# Altium PCB 下.PCBDOC
Units mm, origin at the board's own origin, x right, y up, seen from the top; angles counter-clockwise.
Board outline 146 x 45 mm, 2 copper layers (Top Layer, Bottom Layer); 4 components, 41 nets, 122 pads, 0 vias.
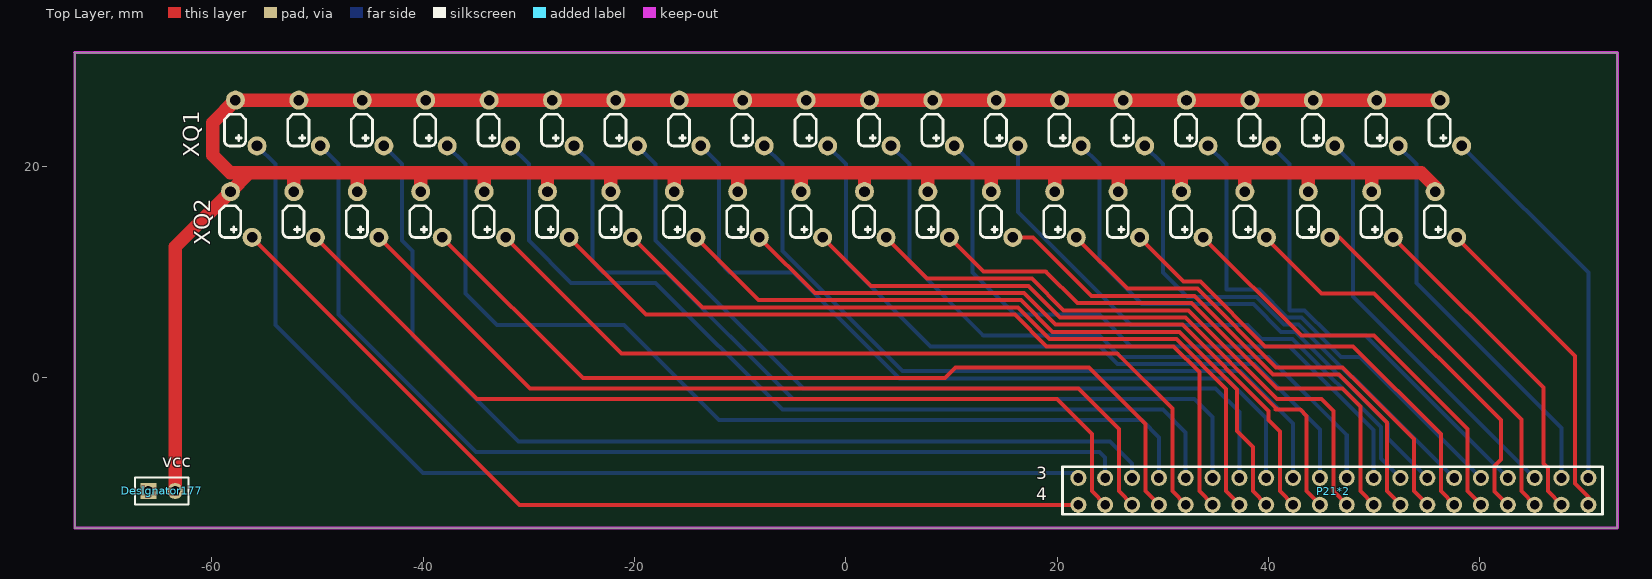
[diagram p0: Top Layer view]
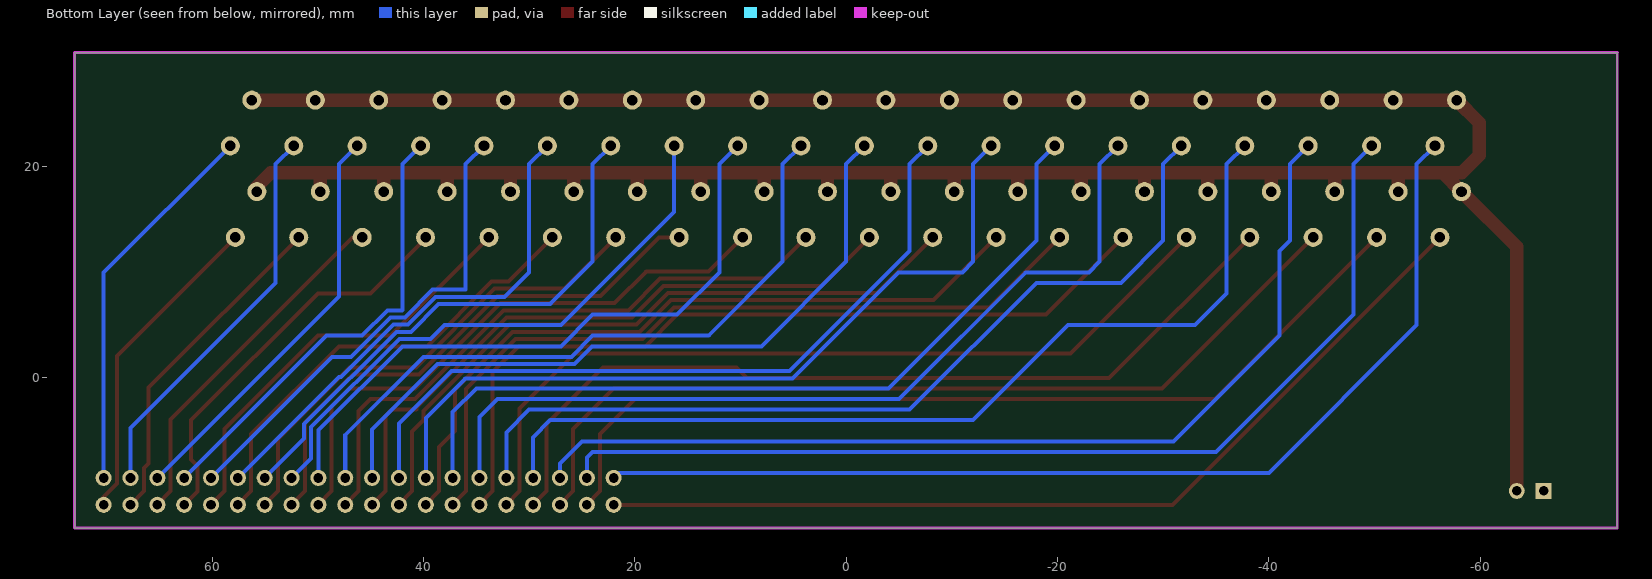
[diagram p1: Bottom Layer view, seen from below]

## Layer stack, top to bottom
Top Layer: signal copper 0.0356
Dielectric: dielectric 0.32, FR-4, Dk 4.8
Bottom Layer: signal copper 0.0356

## Board outline
-72.979,-14.2 73.022,-14.2 73.022,30.8 -72.978,30.8 -72.979,30.799

## Design rules (kind name [scope] priority, off if disabled: settings)
Clearance [All] p1: gap=0.3
FabricationTestPointUsage TestPointUsage [All] p1: valid=0 allowmultiple=FALSE
FabricationTestpoint Testpoint [All] p1: side=3 testpointundercomponent=TRUE minsize=1.016 maxsize=2.54 preferedsize=1.524 minholesize=0 maxholesize=1.016 preferedholesize=0.813 testpointgrid=0.025 allowsidetop=TRUE allowsidebottom=TRUE usegrid=TRUE gridtolerance=0
PolygonConnect [All] p1: connectstyle=Relief reliefconductorwidth=0.254 reliefentries=4 polygonreliefangle="90 Angle" airgapwidth=0.254
RoutingVias [All] p1: holewidth=0.8 width=1.6 viastyle="Through Hole" minholewidth=0.711 minwidth=1.27 maxholewidth=0.711 maxwidth=1.27
SilkToSolderMaskClearance SilkscreenOverComponentPads [IsPad] p1: minsilkscreentomaskgap=0.254 clearancetoexposedcopper=TRUE
SolderMaskExpansion [All] p1: expansion=0.102
Width Width_1 [All] p1: maxlimit=1.27 minlimit=0.254 preferedwidth=0.381 minimp=50.000000 maximp=50.000000 favimp=50.000000
Width [InNet('GND')] p2: maxlimit=1.27 minlimit=0.254 preferedwidth=0.381
25 further rules are at their usual default settings.

## Components (designator, comment, footprint, x,y, rotation, side; value= is the part's Value field where it differs from the comment)
Designator177 "" HDR1X2 -66.015,-10.693 r0 top
P21*2 "Header 21X2" XinPian 22,-12 r180 top
XQ1 "Header 20X2" XIANQUAN1 58.272,21.96 r180 top
XQ2 "Header 20X2" XIANQUAN1 57.8,13.3 r180 top

## Footprints (in the part's own frame and the unit in brackets; to place one, negate y for a bottom-side part, rotate by r counter-clockwise, add the part's x,y. Pads: shape width x height; smd on the part's side, far side on the other; paste and mask are expansions set on the pad)
HDR1X2 [mm] "Connector; Header; 2 Position"
  rect 1.5x1.5 hole 0.9: 1(0,0)
  round 1.5 hole 0.9: 2(2.54,0)
  silkscreen extent -1.27,-1.27 3.81,1.27
XIANQUAN1 [mm]
  round 1.8 hole 1: 1(2.04,-4.34) 2(0,0) 3(8.04,-4.34) 4(6,0) 5(14.04,-4.34) 6(12,0) 7(20.04,-4.34) 8(18,0) 9(26.04,-4.34) 10(24,0) 11(32.04,-4.34) 12(30,0) 13(38.04,-4.34) 14(36,0) 15(44.04,-4.34) 16(42,0) 17(50.04,-4.34) 18(48,0) 19(56.04,-4.34) 20(54,0) 21(62.04,-4.34) 22(60,0) 23(68.04,-4.34) 24(66,0) 25(74.04,-4.34) 26(72,0) 27(80.04,-4.34) 28(78,0) 29(86.04,-4.34) 30(84,0) 31(92.04,-4.34) 32(90,0) 33(98.04,-4.34) 34(96,0) 35(104.04,-4.34) 36(102,0) 37(110.04,-4.34) 38(108,0) 39(116.04,-4.34) 40(114,0)
  silkscreen extent 1.08,-3 117.08,0
XinPian [mil]
  round 60 hole 36: 1(0,-100) 2(-100,-100) 3(-200,-100) 4(-300,-100) 5(-400,-100) 6(-500,-100) 7(-600,-100) 8(-700,-100) 9(-800,-100) 10(-900,-100) 11(-1000,-100) 12(-1100,-100) 13(-1200,-100) 14(-1300,-100) 15(-1400,-100) 16(-1500,-100) 17(-1600,-100) 18(-1700,-100) 19(-1800,-100) 20(-1900,-100) 21(-1900,0) 22(-1800,0) 23(-1700,0) 24(-1600,0) 25(-1500,0) 26(-1400,0) 27(-1300,0) 28(-1200,0) 29(-1100,0) 30(-1000,0) 31(-900,0) 32(-800,0) 33(-700,0) 34(-600,0) 35(-500,0) 36(-400,0) 37(-300,0) 38(-200,0) 39(-100,0) 40(0,0)
  silkscreen extent -1953,-142 59,35

## Part data
P21*2: library part "Header 22X2", "Header, 22-Pin, Dual row"
XQ1 XQ2: "Header, 20-Pin, Dual row"

## Nets (pads, with @x,y where several pads share a name; then routed paths per layer and width w, separated by ;. In a path a pad name is that pad's centre, name@x,y a point inside that pad or via, vN(x,y) a via of type N, cw(c..) or ccw(c..) an arc to the next point about the centre after c; other vN are vias at no path point)
GND: Designator177.2 XQ1.1 XQ1.3 XQ1.5 XQ1.7 XQ1.9 XQ1.11 XQ1.13 XQ1.15 XQ1.17 XQ1.19 XQ1.21 XQ1.23 XQ1.25 XQ1.27 XQ1.29 XQ1.31 XQ1.33 XQ1.35 XQ1.37 XQ1.39 XQ2.1 XQ2.3 XQ2.5 XQ2.7 XQ2.9 XQ2.11 XQ2.13 XQ2.15 XQ2.17 XQ2.19 XQ2.21 XQ2.23 XQ2.25 XQ2.27 XQ2.29 XQ2.31 XQ2.33 XQ2.35 XQ2.37 XQ2.39 | length 303
  Top Layer w1.27: Designator177.2 -63.475,12.405 XQ2.39 -56.47,19.41 ; XQ2.37 -52.24,19.37 -52.2,19.41 ; XQ2.35 -46.24,19.35 -46.18,19.41 ; XQ2.33 -40.24,19.32 -40.15,19.41 ; XQ2.31 -34.24,19.37 -34.2,19.41 ; XQ2.29 -28.24,19.35 -28.18,19.41 ; XQ2.27 -22.24,19.22 -22.05,19.41 ; XQ2.25 -16.24,19.25 -16.08,19.41 ; XQ2.23 -10.24,19.41 ; XQ2.21 -4.24,19.4 ; XQ2.19 1.76,19.4 ; XQ2.17 7.76,19.27 7.9,19.41 ; XQ2.15 13.76,19.35 13.82,19.41 ; XQ2.13 19.76,19.22 19.95,19.41 ; XQ2.11 25.76,19.32 25.85,19.41 ; XQ2.9 31.76,19.17 32,19.41 ; XQ2.7 37.76,19.27 37.9,19.41 ; XQ2.5 43.76,19.37 43.8,19.41 ; XQ2.3 49.76,19.4 49.77,19.41 ; XQ2.1 55.76,18.09 54.44,19.41 49.77,19.41 ; XQ1.1 XQ1.39 -59.91,24.159 -59.91,21.07 -58.25,19.41 -56.47,19.41 ; -56.47,19.41 -52.2,19.41 ; -52.2,19.41 -46.18,19.41 ; -46.18,19.41 -40.15,19.41 ; -40.15,19.41 -34.2,19.41 ; -34.2,19.41 -28.18,19.41 ; -28.18,19.41 -22.05,19.41 ; -22.05,19.41 -16.08,19.41 ; -16.08,19.41 -10.24,19.41 ; -10.24,19.41 7.9,19.41 ; 7.9,19.41 13.82,19.41 ; 13.82,19.41 19.95,19.41 ; 19.95,19.41 25.85,19.41 ; 25.85,19.41 32,19.41 ; 32,19.41 37.9,19.41 ; 37.9,19.41 43.8,19.41 ; 43.8,19.41 49.77,19.41
XQ1_1: P21*2.20 XQ1.2 | length 36.4
  Bottom Layer w0.381: XQ1.2 70.26,9.972 P21*2.20
XQ1_2: P21*2.19 XQ1.4 | length 37.8
  Bottom Layer w0.381: XQ1.4 54,20.232 54,9 67.72,-4.72 P21*2.19
XQ1_3: P21*2.18 XQ1.6 | length 39.3
  Bottom Layer w0.381: XQ1.6 48,20.232 48,7.72 P21*2.18
XQ1_4: P21*2.17 XQ1.8 | length 43.5
  Bottom Layer w0.381: XQ1.8 42,20.232 42,6.449 42.044,6.405 43.41,6.405 45.815,4 49.18,4 P21*2.17
XQ1_5: P21*2.16 XQ1.10 | length 45.8
  Bottom Layer w0.381: XQ1.10 36,20.232 36,8.362 39.124,8.362 41.762,5.724 43.128,5.724 46.852,2 48.64,2 P21*2.16
XQ1_6: P21*2.15 XQ1.12 | length 48.3
  Bottom Layer w0.381: XQ1.12 30,20.232 30,10 32.319,7.681 38.842,7.681 41.48,5.043 42.846,5.043 47.789,0.1 48,0.1 P21*2.15
XQ1_7: P21*2.14 XQ1.14 | length 52
  Bottom Layer w0.381: XQ1.14 24,20.232 24,11 28,7 38.56,7 41.198,4.362 42.564,4.362 51.302,-4.376 51.302,-5.742 P21*2.14
XQ1_8: P21*2.13 XQ1.16 | length 54.6
  Bottom Layer w0.381: XQ1.16 16.272,15.728 27,5 38.02,5 39.339,3.681 42.282,3.681 50.621,-4.658 50.621,-7.601 P21*2.13
XQ1_9: P21*2.12 XQ1.18 | length 61.3
  Bottom Layer w0.381: XQ1.18 12,20.232 12,10 16,6 24,6 27,3 42,3 49.94,-4.94 P21*2.12
XQ1_10: P21*2.11 XQ1.20 | length 63.9
  Bottom Layer w0.381: XQ1.20 6,20.232 6,11 13,4 24,4 26,2 40,2 47.4,-5.4 P21*2.11
XQ1_11: P21*2.10 XQ1.22 | length 67.7
  Bottom Layer w0.381: XQ1.22 0,20.232 0,11 8,3 24.037,3 25.718,1.319 38.681,1.319 44.86,-4.86 P21*2.10
XQ1_12: P21*2.9 XQ1.24 | length 70.9
  Bottom Layer w0.381: XQ1.24 -6,20.232 -6,12 5.362,0.638 37.362,0.638 42.32,-4.32 P21*2.9
XQ1_13: P21*2.8 XQ1.26 | length 75.3
  Bottom Layer w0.381: XQ1.26 -12,20.232 -12,11 -11,10 -4.963,10 5.08,-0.043 36.043,-0.043 39.78,-3.78 P21*2.8
XQ1_14: P21*2.7 XQ1.28 | length 77.9
  Bottom Layer w0.381: XQ1.28 -18,20.232 -18,13 -4,-1 35,-1 37.24,-3.24 P21*2.7
XQ1_15: P21*2.6 XQ1.30 | length 82.2
  Bottom Layer w0.381: XQ1.30 -24,20.232 -24,11 -23,10 -17,10 -5,-2 33,-2 34.7,-3.7 P21*2.6
XQ1_16: P21*2.5 XQ1.32 | length 83.7
  Bottom Layer w0.381: XQ1.32 -30,20.232 -30,13 -26,9 -18,9 -6,-3 30,-3 32.16,-5.16 P21*2.5
XQ1_17: P21*2.4 XQ1.34 | length 89.8
  Bottom Layer w0.381: XQ1.34 -36,20.232 -36,8 -33,5 -21,5 -12,-4 28,-4 29.62,-5.62 P21*2.4
XQ1_18: P21*2.3 XQ1.36 | length 93.6
  Bottom Layer w0.381: XQ1.36 -42,20.232 -42,13 -41,12 -41,4 -31,-6 25,-6 27.08,-8.08 P21*2.3
XQ1_19: P21*2.2 XQ1.38 | length 96.7
  Bottom Layer w0.381: XQ1.38 -48,20.232 -48,6 -35,-7 24,-7 24.54,-7.54 P21*2.2
XQ1_20: P21*2.1 XQ1.40 | length 99.7
  Bottom Layer w0.381: XQ1.40 -54,20.232 -54,5 -40,-9 21.54,-9 P21*2.1
XQ2_1: P21*2.21 XQ2.2 | length 30.5
  Top Layer w0.381: XQ2.2 69.007,2.093 69.007,-10.008 70.26,-11.26 P21*2.21
XQ2_2: P21*2.22 XQ2.4 | length 31.9
  Top Layer w0.381: XQ2.4 66,-0.9 66,-8.076 66.432,-8.509 66.432,-10.712 P21*2.22
XQ2_3: P21*2.23 XQ2.6 | length 33.9
  Top Layer w0.381: XQ2.6 46.7,13.3 63.927,-3.927 63.927,-10.712 65.18,-11.965 P21*2.23
XQ2_4: P21*2.24 XQ2.8 | length 38.2
  Top Layer w0.381: XQ2.8 39.8,13.2 45,8 50,8 62,-4 62,-7.716 61.387,-8.329 61.387,-10.747 P21*2.24
XQ2_5: P21*2.25 XQ2.10 | length 40.2
  Top Layer w0.381: XQ2.10 43.1,4 50,4 58.847,-4.847 58.847,-10.712 60.1,-11.965 P21*2.25
XQ2_6: P21*2.26 XQ2.12 | length 43.4
  Top Layer w0.381: XQ2.12 31.971,9.129 33.539,9.129 39.668,3 48,3 56.307,-5.307 56.307,-10.712 57.56,-11.965 P21*2.26
XQ2_7: P21*2.27 XQ2.14 | length 46.6
  Top Layer w0.381: XQ2.14 26.652,8.448 33.257,8.448 40.705,1 47,1 53.767,-5.767 53.767,-10.712 55.02,-11.965 P21*2.27
XQ2_8: P21*2.28 XQ2.16 | length 51
  Top Layer w0.381: XQ2.16 17.7,13.3 23.233,7.767 32.975,7.767 40.423,0.319 46.681,0.319 51.227,-4.227 51.227,-10.712 52.48,-11.965 P21*2.28
XQ2_9: P21*2.29 XQ2.18 | length 55.3
  Top Layer w0.381: XQ2.18 13.014,10.086 18.914,10.086 21.914,7.086 32.692,7.086 40.778,-1 47,-1 48.687,-2.688 48.687,-10.712 49.94,-11.965 P21*2.29
XQ2_10: P21*2.30 XQ2.20 | length 58.5
  Top Layer w0.381: XQ2.20 7.695,9.405 17.595,9.405 20.595,6.405 32.41,6.405 40.815,-2 45,-2 46.147,-3.147 46.147,-10.712 47.4,-11.965 P21*2.30
XQ2_11: P21*2.31 XQ2.22 | length 61.8
  Top Layer w0.381: XQ2.22 2.376,8.724 17.276,8.724 20.276,5.724 32.128,5.724 40.681,-2.829 40.681,-3 43,-3 43.607,-3.607 43.607,-10.712 44.86,-11.965 P21*2.31
XQ2_12: P21*2.32 XQ2.24 | length 64.8
  Top Layer w0.381: XQ2.24 -2.943,8.043 16.846,8.043 19.846,5.043 31.846,5.043 40,-3.111 40,-4 41.067,-5.068 41.067,-10.712 42.32,-11.965 P21*2.32
XQ2_13: P21*2.33 XQ2.26 | length 69.2
  Top Layer w0.381: XQ2.26 -8.262,7.362 16.564,7.362 19.564,4.362 31.564,4.362 37,-1.074 37,-5 38.527,-6.528 38.527,-10.712 39.78,-11.965 P21*2.33
XQ2_14: P21*2.34 XQ2.28 | length 73.6
  Top Layer w0.381: XQ2.28 -13.581,6.681 16.282,6.681 19.282,3.681 31.282,3.681 35.987,-1.024 35.987,-10.712 37.24,-11.965 P21*2.34
XQ2_15: P21*2.35 XQ2.30 | length 78
  Top Layer w0.381: XQ2.30 -18.9,6 16,6 19,3 31,3 33.447,0.553 33.447,-10.712 34.7,-11.965 P21*2.35
XQ2_16: P21*2.36 XQ2.32 | length 79.4
  Top Layer w0.381: XQ2.32 -21.219,2.319 25.681,2.319 30.907,-2.907 30.907,-10.712 32.16,-11.965 P21*2.36
XQ2_17: P21*2.37 XQ2.34 | length 82.9
  Top Layer w0.381: XQ2.34 -24.9,0 9.362,0 10.362,1 23,1 28.367,-4.368 28.367,-10.712 29.62,-11.965 P21*2.37
XQ2_18: P21*2.38 XQ2.36 | length 85.2
  Top Layer w0.381: XQ2.36 -29.9,-1 22,-1 25.827,-4.828 25.827,-10.712 27.08,-11.965 P21*2.38
XQ2_19: P21*2.39 XQ2.38 | length 88.4
  Top Layer w0.381: XQ2.38 -34.9,-2 20,-2 23.287,-5.288 23.287,-10.712 24.54,-11.965 P21*2.39
XQ2_20: P21*2.40 XQ2.40 | length 88.7
  Top Layer w0.381: XQ2.40 -30.9,-12 P21*2.40
pads on no net: Designator177.1

## Keep-outs
Keep-Out Layer:
  lines w0.254: -73,30.799 -72.999,30.8 ; -72.979,30.799 -72.979,-14.2 73.022,-14.2 73.022,30.8
  lines w0.3: -72.978,30.8 73.022,30.8

## Silkscreen, mask and mechanical layers (free items; w line width, h text height)
Top Overlay:
  text "vcc" at -64.694,-8.89 h2.02
  text "3" at 18,-10 h2.02
  text "4" at 18,-12 h2.02
Mechanical 1:
  circle w0.254: c24.005,0.001 r1.5
  circle w0.254: c-23.995,0.001 r1.5
  circle w0.254: c67.527,25.291 r1.5
  circle w0.254: c67.527,19.801 r1.5
  circle w0.254: c67.527,14.291 r1.5
  circle w0.254: c-67.473,14.291 r1.5
  circle w0.254: c-67.473,19.801 r1.5
  circle w0.254: c-67.473,25.291 r1.5
  circle w0.254: c-55.749,17.29 r0.5
  circle w0.254: c-49.749,17.29 r0.5
  circle w0.254: c-52.249,22.29 r0.5
  circle w0.254: c-43.749,17.29 r0.5
  circle w0.254: c-46.249,22.29 r0.5
  circle w0.254: c-37.749,17.29 r0.5
  circle w0.254: c-40.249,22.29 r0.5
  circle w0.254: c-31.749,17.29 r0.5
  circle w0.254: c-34.249,22.29 r0.5
  circle w0.254: c-25.749,17.29 r0.5
  circle w0.254: c-28.249,22.29 r0.5
  circle w0.254: c-19.749,17.29 r0.5
  circle w0.254: c-22.249,22.29 r0.5
  circle w0.254: c-13.749,17.29 r0.5
  circle w0.254: c-16.249,22.29 r0.5
  circle w0.254: c-7.749,17.29 r0.5
  circle w0.254: c-10.249,22.29 r0.5
  circle w0.254: c58.251,17.29 r0.5
  circle w0.254: c55.751,22.29 r0.5
  circle w0.254: c52.251,17.29 r0.5
  circle w0.254: c49.751,22.29 r0.5
  circle w0.254: c46.251,17.29 r0.5
  circle w0.254: c43.751,22.29 r0.5
  circle w0.254: c40.251,17.29 r0.5
  circle w0.254: c37.751,22.29 r0.5
  circle w0.254: c34.251,17.29 r0.5
  circle w0.254: c31.751,22.29 r0.5
  circle w0.254: c28.251,17.29 r0.5
  circle w0.254: c25.751,22.29 r0.5
  circle w0.254: c22.251,17.29 r0.5
  circle w0.254: c19.751,22.29 r0.5
  circle w0.254: c16.251,17.29 r0.5
  circle w0.254: c13.751,22.29 r0.5
  circle w0.254: c10.251,17.29 r0.5
  circle w0.254: c7.751,22.29 r0.5
  circle w0.254: c4.251,17.29 r0.5
  circle w0.254: c1.751,22.29 r0.5
  circle w0.254: c-4.249,22.29 r0.5
  circle w0.254: c-1.749,17.29 r0.5
  circle w0.254: c-58.249,22.29 r0.5
  circle w0.254: c-67.478,25.29 r1.5
  circle w0.254: c-67.478,19.8 r1.5
  circle w0.254: c-67.478,14.29 r1.5
  circle w0.254: c67.522,14.29 r1.5
  circle w0.254: c67.522,19.8 r1.5
  circle w0.254: c67.522,25.29 r1.5
  circle w0.254: c-24,0 r1.5
  circle w0.254: c24,0 r1.5